# EAGLE board smarty_sup02 (EAGLE 6.5.0)
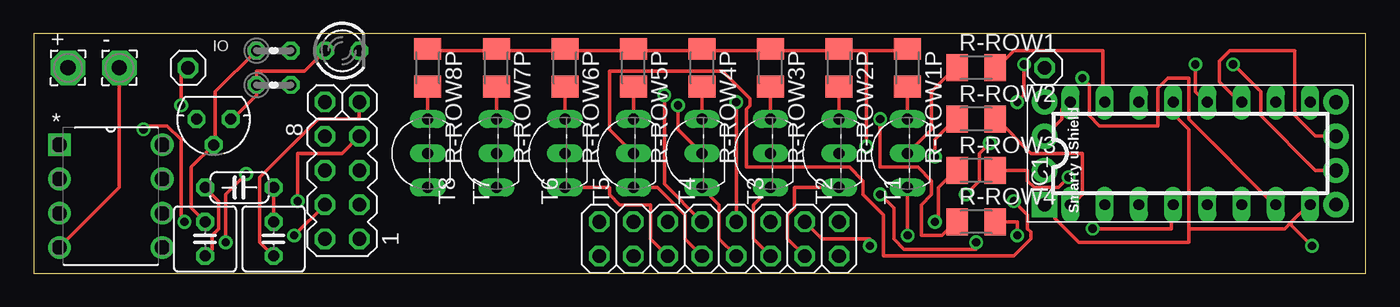
[diagram p0: board, top side]
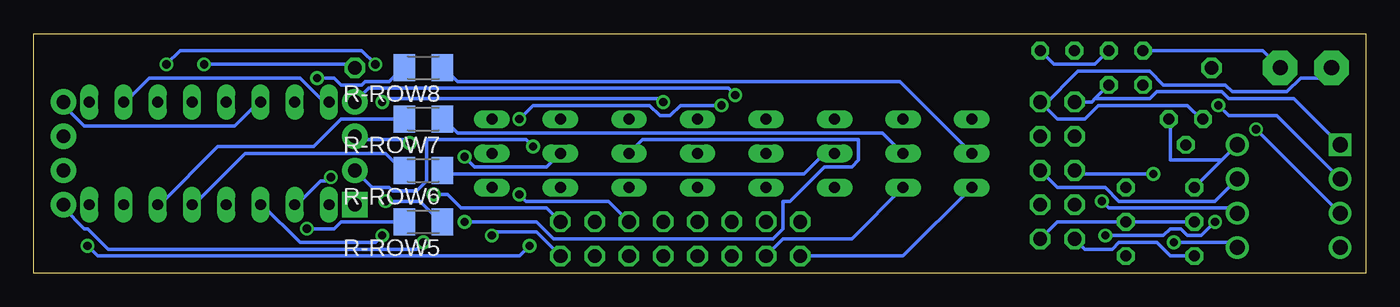
[diagram p1: board, bottom side, seen from below]

Size 98.73 x 17.77 mm. Coordinates in mm from the lower left corner, seen from the top.
Outline: 0,0 98.73,0 98.73,17.77 0,17.77 0,0
Copper layers (1*16): Top 0.035mm / dielectric 1.5mm / Bottom 0.035mm
Design rules "default": minimum track width 10mil, minimum drill 24mil, track to track 8mil, track to pad 8mil, pad to pad 8mil, via to via 8mil, smd to smd 8mil, copper to edge 40mil, drill to drill 8mil, minimum pad ring 10mil, minimum via ring 8mil, stop-mask expansion 4mil, vias tented up to drill 0mil, thermal gap 10mil
Net classes: 0 default: width 0.203 mm, drill 0.203 mm, clearance 0.152 mm; 1 power: width 0.254 mm, drill 0.406 mm, clearance 0.152 mm

## Footprints (pad centres in the part's own frame; a part is rotated, then mirrored left to right if it is on the bottom)
78LXX = drill 0.813 octagon: GND 0,1.905; IN 1.27,0; OUT -1.27,0
2,54/1,1 = drill 1.118 pad 2.54 octagon: 1 0,0
MA04-2 = drill 1.016 octagon: 1 -3.81,-1.27; 2 -3.81,1.27; 3 -1.27,-1.27; 4 -1.27,1.27; 5 1.27,-1.27; 6 1.27,1.27; 7 3.81,-1.27; 8 3.81,1.27
C025-050X050 = drill 0.813 octagon: 1 -1.27,0; 2 1.27,0
C050-024X044 = drill 0.813 octagon: 1 -2.54,0; 2 2.54,0
DIL16 = drill 0.813 long: 1 -8.89,-3.81; 2 -6.35,-3.81; 3 -3.81,-3.81; 4 -1.27,-3.81; 5 1.27,-3.81; 6 3.81,-3.81; 7 6.35,-3.81; 8 8.89,-3.81; 9 8.89,3.81; 10 6.35,3.81; 11 3.81,3.81; 12 1.27,3.81; 13 -1.27,3.81; 14 -3.81,3.81; 15 -6.35,3.81; 16 -8.89,3.81
1X01 = drill 1.016 octagon: 1 0,0
SMARTY-USHIELD-2.54 = drill 1.016 pad 1.88: A4 3.81,-11.43; A5 1.27,-11.43; P3~ 3.81,10.16; P5 -3.81,-11.43; P6 -1.27,-11.43; UVCC 1.27,10.16; UVSS -1.27,10.16 | drill 1.016 pad 1.88 square: UGND -3.81,10.16
2X08 = drill 1.016 octagon: 1 -8.89,-1.27; 2 -8.89,1.27; 3 -6.35,-1.27; 4 -6.35,1.27; 5 -3.81,-1.27; 6 -3.81,1.27; 7 -1.27,-1.27; 8 -1.27,1.27; 9 1.27,-1.27; 10 1.27,1.27; 11 3.81,-1.27; 12 3.81,1.27; 13 6.35,-1.27; 14 6.35,1.27; 15 8.89,-1.27; 16 8.89,1.27
LED3MM = drill 0.813 octagon: A -1.27,0; K 1.27,0
0204V = drill 0.813 octagon: 1 -1.27,0; 2 1.27,0
M1206 = smd 1.6 x 2: 1 -1.4,0; 2 1.4,0
TO92-EBC-OVAL = drill 0.813 long: B 0,-1.27; C 2.54,-1.27; E -2.54,-1.27
DIP254P762X533-8 = drill 1.118 square: 1 -7.62,7.62 | drill 1.118: 2 -7.62,5.08; 3 -7.62,2.54; 4 -7.62,0; 5 0,0; 6 0,2.54; 7 0,5.08; 8 0,7.62

## Placement (x,y rotation side)
3.3VREG  [78LXX]  13.34,11.43 180 top
+  [2,54/1,1]  2.54,15.24 0 top
-  [2,54/1,1]  6.35,15.24 0 top
ANNAREF3  [MA04-2]  22.86,6.35 90 top
C11  10uF  [C025-050X050]  17.78,2.54 90 top
C12  10uF  [C025-050X050]  12.7,2.54 90 top
C13  100nF  [C050-024X044]  15.24,6.35 180 top
IC1  74LS595N  [DIL16]  85.72,8.89 0 top
IO  [1X01]  11.43,15.24 0 top
J1  [SMARTY-USHIELD-2.54]  85.09,8.89 90 top
JP2  [1X01]  74.93,15.24 0 top
JP9  [2X08]  50.8,2.54 180 top
LED1  [LED3MM]  22.86,16.51 0 top
R1  10k  [0204V]  17.78,13.97 0 top
R-LED1  120  [0204V]  17.78,16.51 0 top
R-ROW1  4.7k  [M1206]  69.85,15.24 0 top
R-ROW1P  1k  [M1206]  64.77,15.24 270 top
R-ROW2  4.7k  [M1206]  69.85,11.43 0 top
R-ROW2P  1k  [M1206]  59.69,15.24 270 top
R-ROW3  4.7k  [M1206]  69.85,7.62 0 top
R-ROW3P  1k  [M1206]  54.61,15.24 270 top
R-ROW4  4.7k  [M1206]  69.85,3.81 0 top
R-ROW4P  1k  [M1206]  49.53,15.24 270 top
R-ROW5  4.7k  [M1206]  69.85,3.81 180 bottom
R-ROW5P  1k  [M1206]  44.45,15.24 270 top
R-ROW6  4.7k  [M1206]  69.85,7.62 180 bottom
R-ROW6P  1k  [M1206]  39.37,15.24 270 top
R-ROW7  4.7k  [M1206]  69.85,11.43 180 bottom
R-ROW7P  1k  [M1206]  34.29,15.24 270 top
R-ROW8  4.7k  [M1206]  69.85,15.24 180 bottom
R-ROW8P  1k  [M1206]  29.21,15.24 270 top
RESET1  [1X01]  21.59,12.7 0 top
T1  2N2222  [TO92-EBC-OVAL]  63.5,8.89 90 top
T2  2N2222  [TO92-EBC-OVAL]  58.42,8.89 90 top
T3  2N2222  [TO92-EBC-OVAL]  53.34,8.89 90 top
T4  2N2222  [TO92-EBC-OVAL]  48.26,8.89 90 top
T5  2N2222  [TO92-EBC-OVAL]  43.18,8.89 90 top
T6  2N2222  [TO92-EBC-OVAL]  38.1,8.89 90 top
T7  2N2222  [TO92-EBC-OVAL]  33.02,8.89 90 top
T8  2N2222  [TO92-EBC-OVAL]  27.94,8.89 90 top
U1  ATTINY85-20PU  [DIP254P762X533-8]  9.53,1.91 0 top
VSS1  [1X01]  24.13,12.7 0 top

## Library data of the parts
3.3VREG = v-reg
+ - = wirepad
ANNAREF3 = con-lstb; OC_FARNELL: unknown; OC_NEWARK: unknown
C11-C13 = rcl
IC1 = SparkFun-DigitalIC
IO JP2 JP9 RESET1 VSS1 = pinhead
J1 = smarties
LED1 = led
R1 R-LED1 R-ROW1 R-ROW1P R-ROW2 R-ROW2P R-ROW3 R-ROW3P R-ROW4 R-ROW4P R-ROW5 R-ROW5P R-ROW6 R-ROW6P R-ROW7 R-ROW7P R-ROW8 R-ROW8P = resistor
T1-T8 = adafruit
U1 = Atmel_By_element14_Batch_1-00; MPN: ATTINY85-20PU; OC_FARNELL: 1455162; OC_NEWARK: 58M3796; PACKAGE: PDIP-8; SUPPLIER: Atmel

## Nets
85_3V3: 3.3VREG.OUT ANNAREF3.2 C12.1 C13.2 LED1.A R1.1 U1.8
85_CE: ANNAREF3.3
85_CS: ANNAREF3.4 U1.3
85_GND [power]: 3.3VREG.GND -.1 ANNAREF3.1 C11.2 C12.2 C13.1 R-LED1.1 U1.4
85_IO: IO.1 U1.2
85_IRQ: ANNAREF3.8
85_MISO: ANNAREF3.7 U1.6
85_MOSI: ANNAREF3.6 U1.5
85_RST: R1.2 RESET1.1 U1.1
85_SCK: ANNAREF3.5 U1.7
85_VSS: 3.3VREG.IN +.1 C11.1 VSS1.1
MX_CLOCK: J1.P5 JP9.5
MX_CLOCK_ROWS: IC1.11 J1.A5
MX_DATA: J1.P3~ JP9.9
MX_DATA_ROWS: IC1.14 J1.A4
MX_GND: IC1.8 IC1.13 J1.UGND JP9.3
MX_LATCH: J1.P6 JP9.7
MX_LATCH_ROWS: IC1.12 JP2.1
MX_VCC: IC1.10 IC1.16 J1.UVCC JP9.1
MX_VSS: J1.UVSS R-ROW1P.1 R-ROW2P.1 R-ROW3P.1 R-ROW4P.1 R-ROW5P.1 R-ROW6P.1 R-ROW7P.1 R-ROW8P.1
N$2: R-ROW2.1 T2.B
N$3: R-ROW1.1 T1.B
N$4: R-ROW1P.2 T1.C
N$5: R-ROW2P.2 T2.C
N$19: R-ROW3.1 T3.B
N$20: R-ROW3P.2 T3.C
N$21: R-ROW4.1 T4.B
N$22: R-ROW4P.2 T4.C
N$23: R-ROW5.1 T5.B
N$24: R-ROW5P.2 T5.C
N$25: R-ROW6.1 T6.B
N$26: R-ROW6P.2 T6.C
N$27: R-ROW7.1 T7.B
N$28: R-ROW7P.2 T7.C
N$29: R-ROW8.1 T8.B
N$30: R-ROW8P.2 T8.C
N$51: LED1.K R-LED1.2
N$96: JP9.11
N$97: JP9.13
N$98: JP9.15
REG-ROW1: IC1.15 R-ROW1.2
REG-ROW2: IC1.1 R-ROW2.2
REG-ROW3: IC1.2 R-ROW3.2
REG-ROW4: IC1.3 R-ROW4.2
REG-ROW5: IC1.4 R-ROW5.2
REG-ROW6: IC1.5 R-ROW6.2
REG-ROW7: IC1.6 R-ROW7.2
REG-ROW8: IC1.7 R-ROW8.2
ROW1: JP9.2 T1.E
ROW2: JP9.4 T2.E
ROW3: JP9.6 T3.E
ROW4: JP9.8 T4.E
ROW5: JP9.10 T5.E
ROW6: JP9.12 T6.E
ROW7: JP9.14 T7.E
ROW8: JP9.16 T8.E

## Tracks (layer width: path | path; a pad name or v marks a point on that pad's centre or on a via)
85_3V3
  Top 0.254: 3.3VREG.OUT 14.73,11.43 16.51,13.21 R1.1 16.51,14.99 20.07,14.99 LED1.A | C12.1 13.21,1.78 13.21,2.79 13.72,3.3 13.72,5.33 C13.2
  Bottom 0.254: ANNAREF3.2 20.83,1.78 18.8,1.78 18.29,2.29 15.49,2.29 14.48,1.27 C12.1 | C13.2 10.67,8.38 | 10.67,8.38 U1.8 | 10.67,8.38 14.48,8.38 14.48,11.43 3.3VREG.OUT
85_CS  (via drill 0.61)
  Top 0.254: v19.3,2.79 ANNAREF3.4 | v11.18,3.81 10.92,4.06 10.92,9.91 9.91,10.92 8.13,10.92 v8.13,10.67
  Bottom 0.254: v19.3,2.79 14.99,2.79 14.48,3.3 13.72,3.3 13.21,2.79 12.19,2.79 v11.18,3.81 | U1.3 v8.13,10.67
85_GND
  Top 0.254: U1.4 6.35,6.35 -.1 | C12.2 11.68,4.83 11.68,7.87 3.3VREG.GND 13.46,9.65 13.46,13.46 R-LED1.1 | C11.2 C13.1
  Bottom 0.254: C12.2 C11.2 22.86,3.81 ANNAREF3.1 | -.1 7.62,16.51 R-LED1.1
85_IO  (via drill 0.61)
  Top 0.254: IO.1 10.92,14.73 v10.92,12.45
  Bottom 0.254: v10.92,12.45 10.16,11.68 6.6,11.68 U1.2
85_MISO  (via drill 0.61)
  Top 0.254: ANNAREF3.7 22.86,8.89 19.56,8.89 v19.56,5.33
  Bottom 0.254: v19.56,5.33 19.05,4.83 9.91,4.83 U1.6
85_MOSI  (via drill 0.61)
  Top 0.254: v15.75,7.37 14.22,5.84 v14.22,2.29
  Bottom 0.254: ANNAREF3.6 21.34,7.37 v15.75,7.37 | v14.22,2.29 9.91,2.29 U1.5
85_RST
  Bottom 0.254: 20.07,12.95 20.32,12.7 RESET1.1 | 20.07,12.95 R1.2 | U1.1 5.33,12.95 10.16,12.95 10.67,13.46 15.49,13.46 16,12.95 20.07,12.95
85_SCK
  Bottom 0.254: ANNAREF3.5 22.86,6.35 19.3,6.35 18.29,5.33 11.18,5.33 U1.7
85_VSS
  Top 0.254: C11.1 16.76,2.29 16.76,7.11 21.08,11.43 24.13,11.43 VSS1.1
  Bottom 0.254: 23.88,12.45 22.86,11.43 20.83,11.43 19.81,12.45 13.21,12.45 12.19,11.43 3.3VREG.IN | +.1 3.3,14.48 4.83,14.48 5.84,13.46 9.91,13.46 10.41,13.97 14.99,13.97 16,14.99 21.34,14.99 23.88,12.45 | 23.88,12.45 VSS1.1
MX_CLOCK  (via drill 0.61)
  Top 0.254: v62.74,5.84 63.75,4.83 63.75,2.54 64.52,1.78 69.85,1.78 v69.85,2.29
  Bottom 0.254: JP9.5 56.13,5.33 62.23,5.33 v62.74,5.84 | v69.85,2.29 70.36,1.78 93.22,1.78 94.74,3.3 95,3.3 96.52,4.83 J1.P5
MX_CLOCK_ROWS
  Top 0.254: J1.A5 95,10.16 93.47,11.68 93.47,16.51 88.65,16.51 87.88,15.75 87.88,14.22 89.41,12.7 IC1.11
MX_DATA  (via drill 0.61)
  Top 0.254: JP9.9 46.74,6.6 v46.74,13.21
  Bottom 0.254: v46.74,13.21 47.24,13.72 73.91,13.72 J1.P3~
MX_DATA_ROWS
  Bottom 0.254: J1.A4 96.52,12.45 95,10.92 83.82,10.92 82.04,12.7 IC1.14
MX_GND  (via drill 0.61)
  Top 0.254: 93.22,3.81 92.71,3.3 85.6,3.3 | 93.22,3.81 94.49,5.08 IC1.8 | 85.6,3.3 85.6,10.67 84.58,11.68 84.58,12.7 IC1.13 | JP9.3 58.42,2.54 61.98,2.54 v61.98,2.03 | v94.74,2.03 93.22,3.56 93.22,3.81 | J1.UGND 75.69,4.32 75.69,4.06 77.47,2.29 85.6,2.29 85.6,3.3
  Bottom 0.254: v61.98,2.03 62.74,1.27 93.98,1.27 v94.74,2.03
MX_LATCH  (via drill 0.61)
  Top 0.254: v52.07,12.7 JP9.7 | v72.9,12.7 73.41,13.21 v73.41,15.49 | v88.9,15.49 90.93,13.46 90.93,11.68 95,7.62 J1.P6
  Bottom 0.254: v52.07,12.7 52.32,12.95 72.64,12.95 v72.9,12.7 | v73.41,15.49 74.42,16.51 87.88,16.51 v88.9,15.49
MX_LATCH_ROWS  (via drill 0.61)
  Top 0.254: v86.11,15.49 86.11,13.46 86.87,12.7 IC1.12
  Bottom 0.254: v86.11,15.49 75.18,15.49 JP2.1
MX_VCC  (via drill 0.61)
  Top 0.254: J1.UVCC 76.2,11.43 76.2,12.19 76.71,12.7 IC1.16 | v69.09,5.84 70.1,6.86 70.1,8.89 v70.87,9.65
  Bottom 0.254: IC1.16 77.22,12.7 78.99,14.48 90.17,14.48 91.95,12.7 IC1.10 | JP9.1 60.71,4.83 67.06,4.83 68.07,5.84 v69.09,5.84 | v70.87,9.65 71.12,9.91 74.68,9.91 J1.UVCC
MX_VSS  (via drill 0.61)
  Top 0.254: 34.29,16.51 29.21,16.51 R-ROW8P.1 | 34.29,16.51 39.37,16.51 | 34.29,16.51 R-ROW7P.1 | 39.37,16.51 44.45,16.51 | 39.37,16.51 R-ROW6P.1 | 44.45,16.51 49.53,16.51 | 44.45,16.51 R-ROW5P.1 | 49.53,16.51 54.61,16.51 | 49.53,16.51 R-ROW4P.1 | 54.61,16.51 59.69,16.51 | 54.61,16.51 R-ROW3P.1 | 59.69,16.51 61.72,16.51 | 61.72,16.51 64.77,16.51 R-ROW1P.1 | 59.69,16.51 R-ROW2P.1 | 61.72,16.51 v61.72,9.4
  Bottom 0.254: J1.UVSS 73.66,6.35 72.39,6.35 72.14,6.1 70.36,6.1 69.6,6.86 69.6,9.91 62.23,9.91 v61.72,9.4
N$2  (via drill 0.61)
  Top 0.254: v66.8,8.64 66.8,9.91 68.33,11.43 R-ROW2.1
  Bottom 0.254: v66.8,8.64 66.04,7.87 60.71,7.87 T2.B
N$3
  Top 0.254: T1.B 66.55,10.67 66.55,13.46 68.33,15.24 R-ROW1.1
N$4
  Top 0.254: T1.C R-ROW1P.2
N$5
  Top 0.254: T2.C R-ROW2P.2
N$19  (via drill 0.61)
  Top 0.254: v66.8,3.81 67.06,4.06 67.06,6.35 68.33,7.62 R-ROW3.1
  Bottom 0.254: v66.8,3.81 61.47,3.81 60.2,2.54 43.94,2.54 43.18,3.3 43.18,5.33 42.67,5.33 40.13,7.87 38.1,7.87 37.59,8.38 37.59,9.91 53.59,9.91 T3.B
N$20
  Top 0.254: T3.C R-ROW3P.2
N$21  (via drill 0.61)
  Top 0.254: v62.74,11.43 62.74,7.87 65.53,7.87 66.55,6.86 66.55,5.84 65.79,5.08 65.79,2.79 67.31,2.79 68.33,3.81 R-ROW4.1 | v47.75,12.45 47.75,10.67 T4.B
  Bottom 0.254: v62.74,11.43 61.72,12.45 53.09,12.45 52.32,11.68 51.56,11.68 50.8,12.45 v47.75,12.45
N$22
  Top 0.254: T4.C R-ROW4P.2
N$23  (via drill 0.61)
  Top 0.254: v72.64,5.33 73.66,4.32 73.66,3.3 73.91,3.05 73.91,2.54 72.64,1.27 62.99,1.27 62.99,4.32 61.47,5.84 61.47,6.86 60.45,7.87 52.83,7.87 52.83,12.19 53.09,12.45 53.09,12.95 51.05,14.99 42.67,14.99 42.67,10.67 T5.B
  Bottom 0.254: v72.64,5.33 70.1,5.33 68.58,3.81 R-ROW5.1
N$24
  Top 0.254: T5.C R-ROW5P.2
N$25
  Bottom 0.254: T6.B 40.13,8.89 41.66,7.37 68.07,7.37 68.33,7.62 R-ROW6.1
N$26
  Top 0.254: T6.C R-ROW6P.2
N$27
  Bottom 0.254: T7.B 35.81,10.41 67.31,10.41 68.33,11.43 R-ROW7.1
N$28
  Top 0.254: T7.C R-ROW7P.2
N$29
  Bottom 0.254: T8.B 34.54,14.22 67.31,14.22 68.33,15.24 R-ROW8.1
N$30
  Top 0.254: T8.C R-ROW8P.2
N$51
  Bottom 0.254: R-LED1.2 20.07,15.49 23.11,15.49 LED1.K
REG-ROW1
  Top 0.254: R-ROW1.2 71.37,15.24 72.64,16.51 79.25,16.51 79.25,12.7 IC1.15
REG-ROW2
  Top 0.254: R-ROW2.2 71.37,11.43 73.91,8.89 77.72,8.89 77.72,5.84 76.96,5.08 IC1.1
REG-ROW3  (via drill 0.61)
  Top 0.254: R-ROW3.2 73.66,7.62 73.66,6.86 74.17,6.35 75.95,6.35 v76.71,7.11
  Bottom 0.254: v76.71,7.11 76.96,6.86 77.47,6.86 79.25,5.08 IC1.2
REG-ROW4  (via drill 0.61)
  Top 0.254: R-ROW4.2 72.9,3.81 v72.9,2.79
  Bottom 0.254: v72.9,2.79 73.41,2.29 78.99,2.29 81.79,5.08 IC1.3
REG-ROW5  (via drill 0.61)
  Top 0.254: v78.49,3.3 84.33,3.3 84.33,5.08 IC1.4
  Bottom 0.254: R-ROW5.2 75.95,3.81 76.45,3.3 v78.49,3.3
REG-ROW6
  Bottom 0.254: R-ROW6.2 71.37,7.62 72.64,8.89 83.06,8.89 86.87,5.08 IC1.5
REG-ROW7
  Bottom 0.254: R-ROW7.2 75.95,11.43 77.98,9.4 85.09,9.4 89.41,5.08 IC1.6
REG-ROW8  (via drill 0.61)
  Top 0.254: v77.72,14.48 78.23,13.97 78.23,11.68 78.99,10.92 83.31,10.92 83.31,13.72 84.07,14.48 85.6,14.48 85.6,11.43 91.95,5.08 IC1.7
  Bottom 0.254: v77.72,14.48 76.45,14.48 75.95,13.97 74.42,13.97 74.17,14.22 72.39,14.22 71.37,15.24 R-ROW8.2
ROW1  (via drill 0.61)
  Top 0.254: v64.77,2.79 T1.E
  Bottom 0.254: v64.77,2.79 64.52,3.05 61.47,3.05 JP9.2
ROW2
  Top 0.254: T2.E 56.39,6.35 56.39,4.83 55.88,4.32 55.88,2.54 JP9.4
ROW3
  Top 0.254: T3.E 53.34,5.08 53.34,2.54 JP9.6
ROW4
  Top 0.254: T4.E 50.8,5.08 50.8,2.54 JP9.8
ROW5
  Top 0.254: T5.E 46.23,6.35 48.26,4.32 48.26,2.54 JP9.10
ROW6
  Top 0.254: T6.E 42.67,6.35 42.67,5.84 43.43,5.08 45.72,5.08 45.72,2.54 JP9.12
ROW7
  Bottom 0.254: T7.E 38.1,2.54 43.18,2.54 JP9.14
ROW8
  Bottom 0.254: T8.E 34.29,1.27 JP9.16

## Text on the board
tDocu: Tiny Smarty | LED Matrix uShield